# Altium PCB PCB1.PcbDoc
Units mil, origin at the board's own origin, x right, y up, seen from the top; angles counter-clockwise.
Board outline 3535.42 x 2600.42 mil, 4 copper layers (Top Layer, Int1 (GND), Int2 (PWR), Bottom Layer), stack 53.912 mil thick; 78 components, 29 nets, 196 pads, 437 vias.
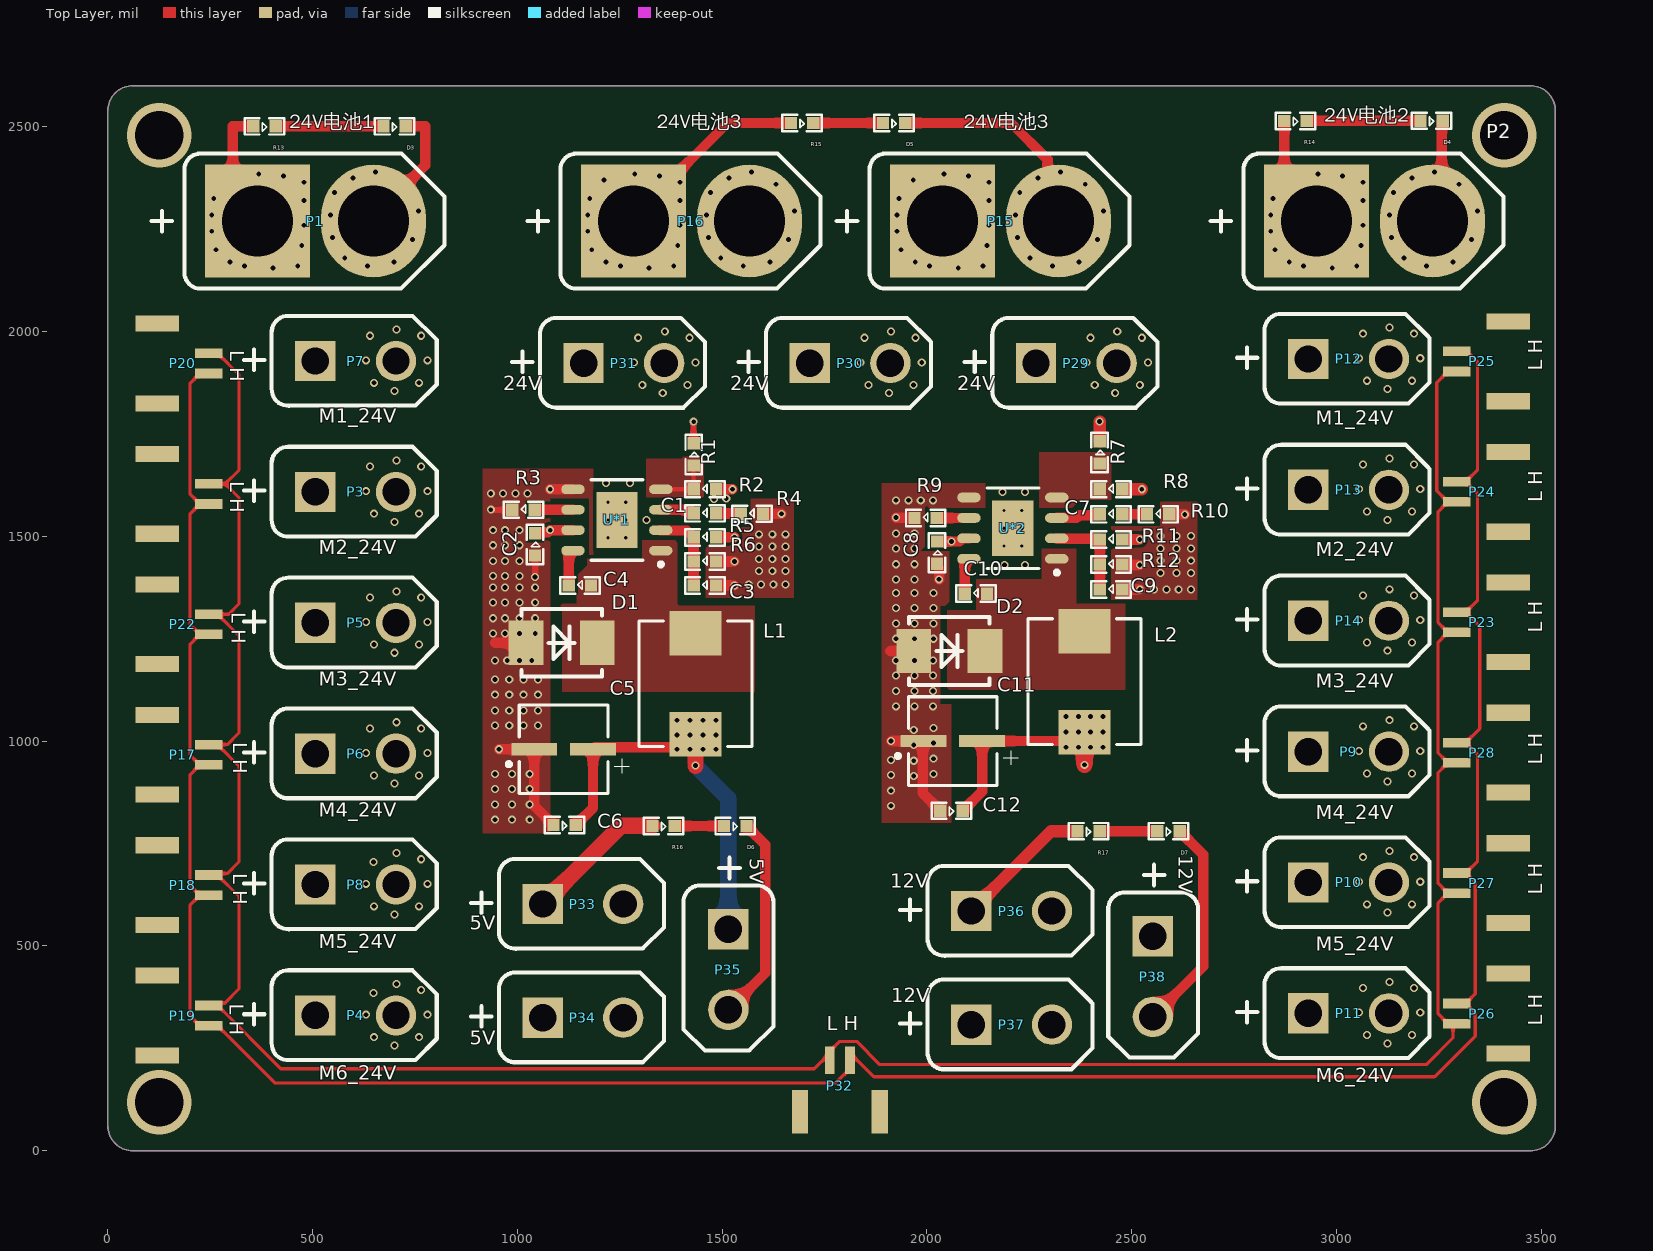
[diagram p0: Top Layer view]
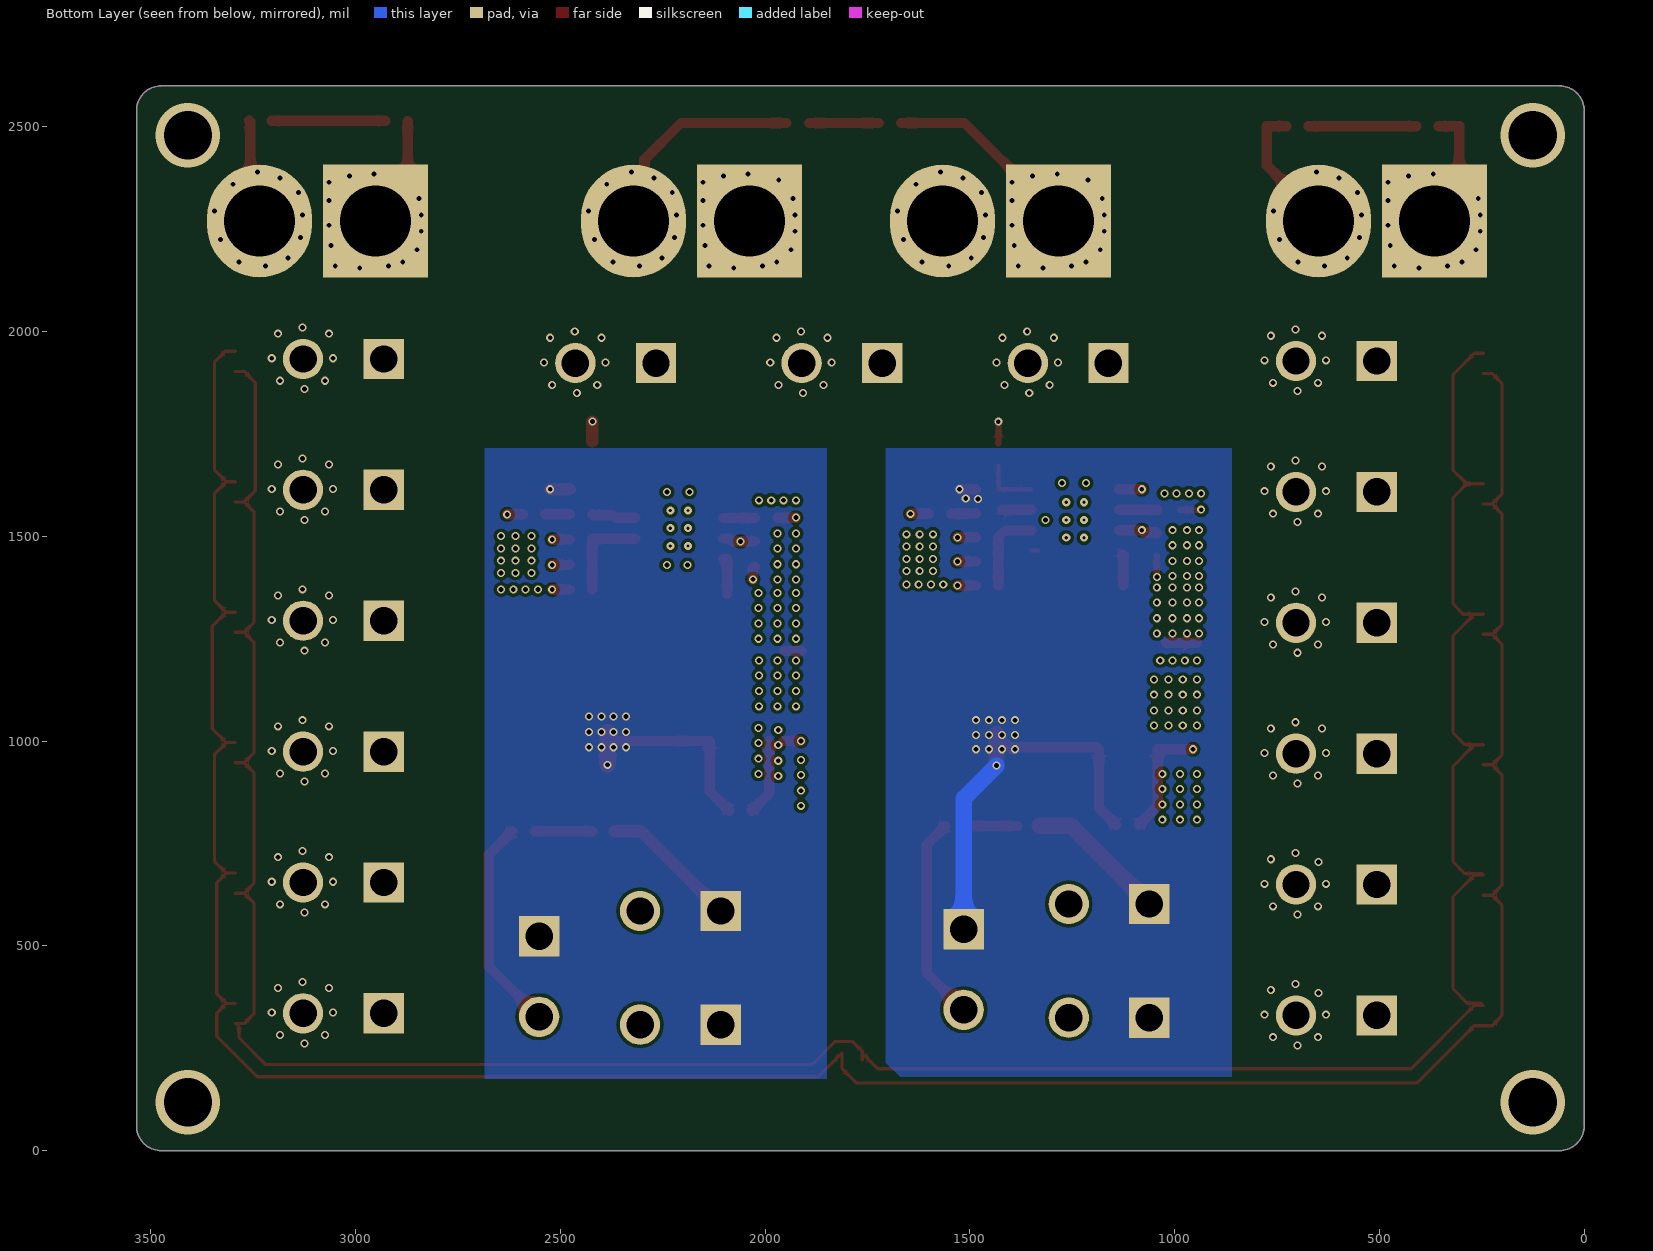
[diagram p1: Bottom Layer view, seen from below]
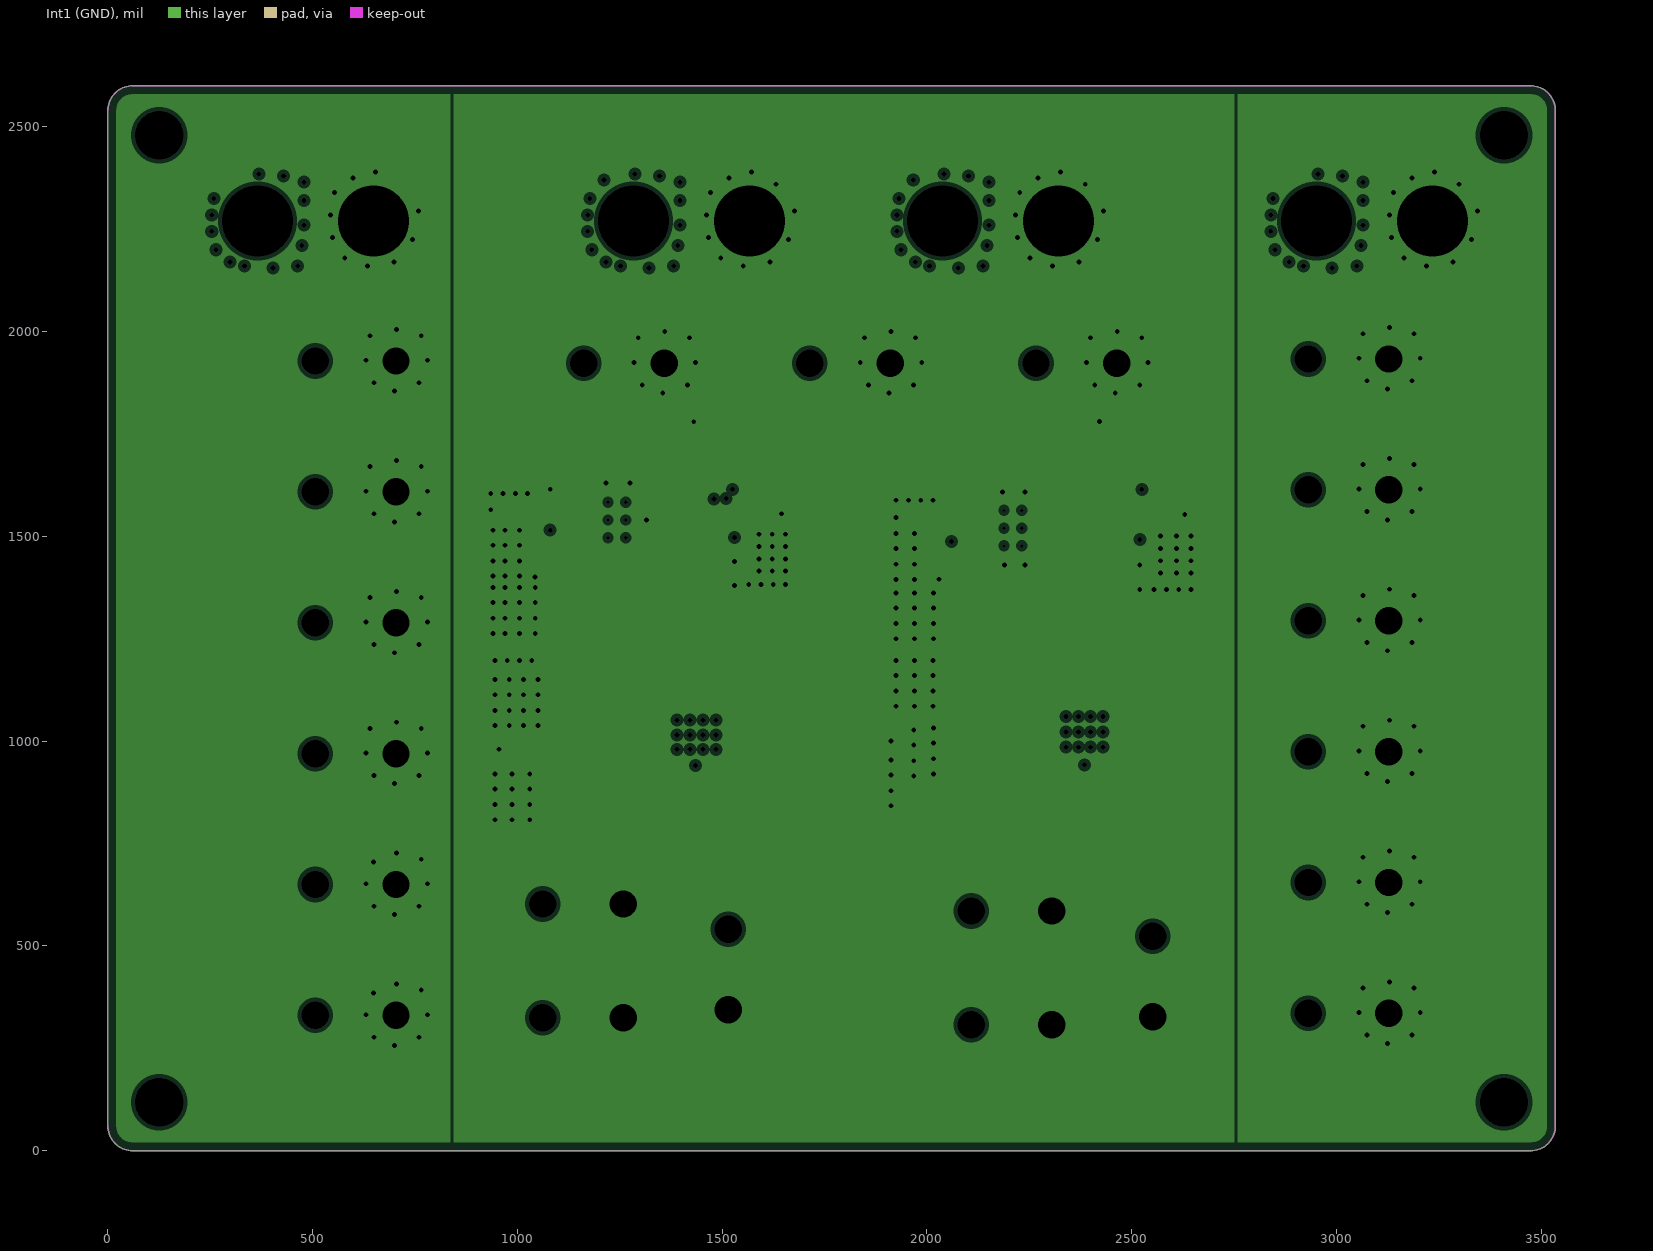
[diagram p2: Int1 (GND), clearances drawn from the general rule]
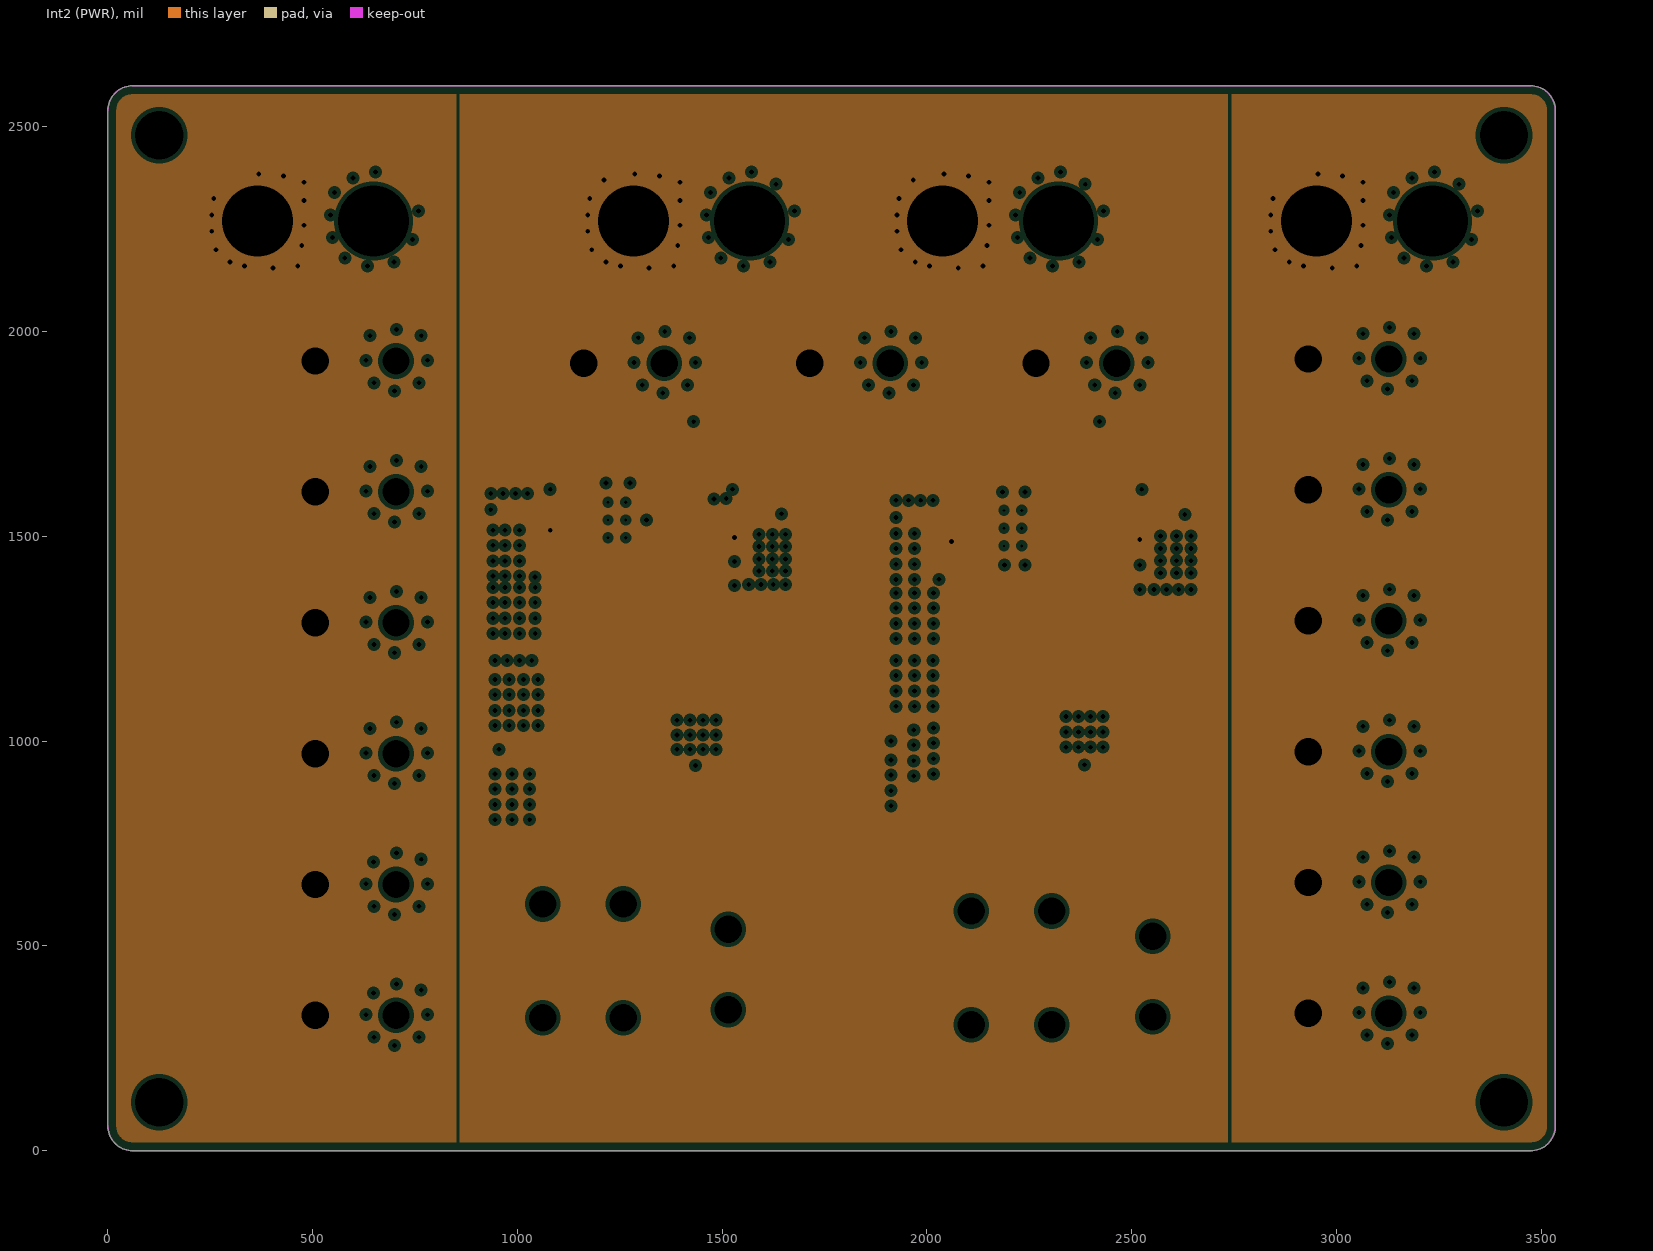
[diagram p3: Int2 (PWR), clearances drawn from the general rule]

## Layer stack, top to bottom
Top Solder: solder mask 1, SM-001, Dk 4
Top Layer: signal copper 1.3779
Dielectric 1: prepreg 5.1, PP-017, Dk 4.3
Dielectric 2: prepreg 5.1, PP-017, Dk 4.3
Int1 (GND): plane copper 1.3779, net (Multiple Nets)
Dielectric 3: core 28, Core-039, Dk 4.8
Int2 (PWR): plane copper 1.3779, net (Multiple Nets)
Dielectric 4: prepreg 5.1, PP-017, Dk 4.3
Dielectric 5: prepreg 5.1, PP-017, Dk 4.3
Bottom Layer: signal copper 1.3779
Bottom Solder: solder mask 1, SM-001, Dk 4

## Board outline
-0.21,60 ccw(c60,60) 60,-0.21 60,0 3475,-0.21 ccw(c3475,60) 3535.21,60 3535,60 3535,2540 3535.21,2540 ccw(c3475,2540) 3475,2600.21 3475,2600 60,2600 60,2600.21 ccw(c60,2540) -0.21,2540 0,2540

## Design rules (kind name [scope] priority, off if disabled: settings)
Clearance Clearance_1 [All] p1: gap=8 ignorepadtopadclearanceinfootprint=FALSE except(0: Arc-Hole Track-Hole SMDPad-Hole THPad-Hole Via-Hole Fill-Hole Poly-Hole Region-Hole Text-Hole)
Clearance Clearance_InPoly [InPolygon] p2: gap=10 ignorepadtopadclearanceinfootprint=FALSE except(0: Arc-Hole Track-Hole SMDPad-Hole THPad-Hole Via-Hole Fill-Hole Poly-Hole Region-Hole Text-Hole)
ComponentClearance [All] p1: gap=10 collisioncheckmode=3 verticalgap=0 showdistances=FALSE
PlaneClearance [All] p1: clearance=10
PlaneConnect [All] p1: planeconnectstyle=Direct reliefexpansion=20 reliefentries=4 reliefconductorwidth=10 reliefairgap=10
PolygonConnect [All] p1: connectstyle=Direct reliefconductorwidth=10 reliefentries=4 polygonreliefangle="90 Angle" airgapwidth=10
RoutingVias [All] p1: holewidth=15 width=25 viastyle="Through Hole" minholewidth=10 minwidth=20 maxholewidth=15 maxwidth=25
SilkToSilkClearance [All] p1: silktosilkclearance=0
SilkToSolderMaskClearance [IsPad] p1: minsilkscreentomaskgap=0 clearancetoexposedcopper=TRUE
SolderMaskExpansion [All] p1: expansion=4
Width Width_PWR [InNetClass('PWR')] p1: maxlimit=100 minlimit=12 preferedwidth=12
Width Width_1 [All] p2: maxlimit=100 minlimit=8 preferedwidth=10
25 further rules are at their usual default settings.

## Components (designator, comment, footprint, x,y, rotation, side; value= is the part's Value field where it differs from the comment)
C1 "Cap" 0603 1457.94,1556.25 r180 top value=150PF
C2 "Cap" 0603 1042.94,1480 r90 top value=100nF
C3 "Cap" 0603 1457.94,1380 r180 top value=100nF
C4 "Cap" 0603 1152.94,1380 r180 top value=100nF
C5 "Cap Pol3" CAP_RVT1E220M0505 1112.94,980 r180 top value=22uF
C6 "Cap" 0603 1115,795 r0 top value=100nF
C7 "Cap" 0603 2450,1553.75 r180 top value=150PF
C8 "Cap" 0603 2025,1460 r90 top value=100nF
C9 "Cap" 0603 2450,1370 r180 top value=100nF
C10 "Cap" 0603 2120,1360 r180 top value=100nF
C11 "Cap Pol3" CAP_RVT1E220M0505 2063.15,1000 r180 top value=22uF
C12 "Cap" 0603 2060,830 r0 top value=100nF
D1 "D Schottky" LC-SMB(DO-214AA)_S2 1107.94,1240 r180 top
D2 "D Schottky" LC-SMB(DO-214AA)_S2 2055,1220 r180 top
D3 "LED0" 0603 700,2501.5 r0 top
D4 "LED0" 0603 3232.5,2515.13 r0 top
D5 "LED0" 0603 1920,2509.51 r0 top
D6 "LED0" 0603 1531.73,792.73 r0 top
D7 "LED0" 0603 2590,780 r0 top
L1 "Inductor" JSHC0650H220M 1435,1140 r270 top value=22uH
L2 "Inductor" JSHC0650H220M 2385,1145 r270 top value=22uH
"L H" "Header 2" GH1.25_2P 8,1701.23 r270 top (schematic designator P21)
P1 "Header 2" TX60-LI-S 506.73,2270 r0 top
P2 "Header 2" TX60-LI-S 3093.27,2270 r0 top
P3 "Header 2" XT30_LI 605,1608.57 r0 top
P4 "Header 2" XT30_LI 605,330 r0 top
P5 "Header 2" XT30_LI 605,1288.93 r0 top
P6 "Header 2" XT30_LI 605,969.28 r0 top
P7 "Header 2" XT30_LI 605,1928.21 r0 top
P8 "Header 2" XT30_LI 605,649.64 r0 top
P9 "Header 2" XT30_LI 3030,974.28 r0 top
P10 "Header 2" XT30_LI 3030,654.64 r0 top
P11 "Header 2" XT30_LI 3030,335 r0 top
P12 "Header 2" XT30_LI 3030,1933.21 r0 top
P13 "Header 2" XT30_LI 3030,1613.57 r0 top
P14 "Header 2" XT30_LI 3030,1293.93 r0 top
P15 "Header 2" TX60-LI-S 2180,2270 r0 top
P16 "Header 2" TX60-LI-S 1425,2270 r0 top
P17 "Header 2" GH1.25_2P 8,1064.14 r270 top
P18 "Header 2" GH1.25_2P 8,745.59 r270 top
P19 "Header 2" GH1.25_2P 8,427.05 r270 top
P20 "Header 2" GH1.25_2P 8,2019.78 r270 top
P22 "Header 2" GH1.25_2P 8,1382.68 r270 top
P23 "Header 2" GH1.25_2P 3532,1192.8 r90 top
P24 "Header 2" GH1.25_2P 3532,1511.35 r90 top
P25 "Header 2" GH1.25_2P 3532,1829.89 r90 top
P26 "Header 2" GH1.25_2P 3532,237.17 r90 top
P27 "Header 2" GH1.25_2P 3532,555.71 r90 top
P28 "Header 2" GH1.25_2P 3532,874.26 r90 top
P29 "Header 2" XT30_LI 2365,1923.21 r0 top
P30 "Header 2" XT30_LI 1812.5,1923.21 r0 top
P31 "Header 2" XT30_LI 1260,1923.21 r0 top
P32 "Header 2" GH1.25_2P 1690.12,-17 r0 top
P33 "Header 2" XT30_LI 1160,602.05 r0 top
P34 "Header 2" XT30_LI 1160,324.55 r0 top
P35 "Header 2" XT30_LI 1515,442.05 r270 top
P36 "Header 2" XT30_LI 2207.01,585 r0 top
P37 "Header 2" XT30_LI 2207.01,307.5 r0 top
P38 "Header 2" XT30_LI 2552.01,425 r270 top
R1 "Res2" 0603 1430.44,1700 r90 top value=40.2K
R2 "Res2" 0603 1457.94,1615 r180 top value=210K
R3 "Res2" 0603 1015,1565 r180 top value=200K
R4 "Res2" 0603 1572.94,1555.06 r180 top value=100K
R5 "Res2" 0603 1457.94,1497.5 r180 top value=500K
R6 "Res2" 0603 1457.94,1438.75 r180 top value=100K
R7 "Res2" 0603 2421.94,1705 r90 top value=40.2K
R8 "Res2" 0603 2450,1615 r180 top value=562K
R9 "Res2" 0603 1997.06,1545 r180 top value=200K
R10 "Res2" 0603 2565,1553.75 r180 top value=147K
R11 "Res2" 0603 2450,1492.5 r180 top value=500K
R12 "Res2" 0603 2450,1431.25 r180 top value=100K
R13 "Res2" 0603 382,2501.5 r0 top value=1.2k
R14 "Res2" 0603 2900,2514.68 r0 top value=1.2k
R15 "Res2" 0603 1695,2509.58 r0 top value=1.2k
R16 "Res2" 0603 1356.73,792.8 r0 top value=270R
R17 "Res2" 0603 2395,780 r0 top value=600R
U*1 "MP1584" MP1584EN_SOIC8E 1242.94,1540 r180 top
U*2 "MP1584" MP1584EN_SOIC8E 2210,1520 r180 top

## Footprints (in the part's own frame and the unit in brackets; to place one, negate y for a bottom-side part, rotate by r counter-clockwise, add the part's x,y. Pads: shape width x height; smd on the part's side, far side on the other; paste and mask are expansions set on the pad)
0603 [mil]
  rect 30x30 smd: 1(-27,0) 2(27.5,-0.06)
  silkscreen extent -48,-20 48,20
CAP_RVT1E220M0505 [mm] "22uf,25V Capacitor"
  rect 2.85x0.75 smd: 1(-1.825,0) 2(1.825,0)
  silkscreen extent -4.06,-2.75 3.52,2.75, body extent -2.75,-2.75 2.75,2.75, height 5.6
GH1.25_2P [mm]
  rect 1x2.7 smd: 0(0,2.845) 0(4.95,2.845)
  rect 0.6x1.7 smd: 1(1.85,6.045) 2(3.1,6.045)
JSHC0650H220M [mm] "Molded Inductor, 2-Leads, Body 7.80x7.00mm, IPC Medium Density"
  rect 2.75x3.2 smd: 1(-3.125,0) 2(3.125,0)
  silkscreen extent -3.9,-3.5 3.9,3.5, body extent -3.9,-3.5 3.9,3.5, height 5
LC-SMB(DO-214AA)_S2 [mil]
  rect 85x107.99 smd: 1(87.01,0) 2(-87.01,0)
  silkscreen extent -98,-83 98,83
MP1584EN_SOIC8E [mm] "SOIC, 8-Leads, Body 4.90x3.90mm, Pitch 1.27mm, Thermal Pad 3.45x2.56mm, IPC Medium Density"
  oval 1.45x0.6 smd: 1(-2.725,1.905) 2(-2.725,0.635) 3(-2.725,-0.635) 4(-2.725,-1.905) 5(2.725,-1.905) 6(2.725,-0.635) 7(2.725,0.635) 8(2.725,1.905)
  rect 2.56x3.45 smd: 9(0,0)
  silkscreen extent -2.85,-2.5 1.6,2.88, body extent -2,-2.5 2,2.5, height 1.7
TX60-LI-S [mm] "长：16mm，宽：8.2mm，高：16mm"
  rect 6.5x7 hole 4.4: 1(-3.6,0)
  oval 6.5x7 hole 4.4: 2(3.6,0)
  silkscreen extent -10.16,-4.19 8,4.19, body extent -8,-4.1 8,4.1, height 16.05
XT30_LI [mm]
  rect 2.5x2.5 hole 1.7: 1(-2.5,0)
  round 2.5 hole 1.7: 2(2.5,0)
  silkscreen extent -6.93,-2.77 5.03,2.8

## Part data
C1 C2 C3 C4 C6 C7 C8 C9 C10 C12: "Capacitor", LatestRevisionDate=17-Jul-2002, LatestRevisionNote="Re-released for DXP Platform.", PackageDescription="Radial Cap, Thru-Hole; 2 Leads; 0.3 in Pin Spacing", PackageReference=RAD-0.3, Published=8-Jun-2000, Publisher="Altium Limited"
C5 C11: "Polarized Capacitor (Surface Mount)", LatestRevisionDate=29-May-2009, LatestRevisionNote="IPC-7351 Footprint Added.", PackageDescription="Chip Capacitor", PackageReference=C0805, Published=8-Jun-2000, Publisher="Altium Limited"
D1 D2: "Schottky Diode", Code_JEDEC=DO-214-AA, LatestRevisionDate=17-Jul-2002, LatestRevisionNote="Re-released for DXP Platform.", PackageDescription="DO-214-AA/SMB; 2 C-Bend Leads; Body 5.3 x 3.6 mm, inc. leads (LxW)", PackageReference=SMB, Published=8-Jun-2000, Publisher="Altium Limited"
D3 D4 D5 D6 D7: "Typical INFRARED GaAs LED", LatestRevisionDate=08-Jul-2005, LatestRevisionNote="Mech Layer 1 removed.", PackageDescription="LED; 2 Leads", PackageReference=LED-0, Published=8-Jun-2000, Publisher="Altium Limited"
"L H" P1 P2 P3 P4 P5 P6 P7 P8 P9 P10 P11 P12 P13 P14 P15 P16 P17 P18 P19 P20 P22 P23 P24 P25 P26 P27 P28 P29 P30 P31 P32 P33 P34 P35 P36 P37 P38: "Header, 2-Pin", LatestRevisionDate=17-Jul-2002, LatestRevisionNote="Re-released for DXP Platform.", Publisher="Altium Limited"
R1 R2 R3 R4 R5 R6 R7 R8 R9 R10 R11 R12 R13 R14 R15 R16 R17: "Resistor", LatestRevisionDate=17-Jul-2002, LatestRevisionNote="Re-released for DXP Platform.", PackageDescription="Axial Device, Thru-Hole; 2 Leads; 0.4 in Pin Spacing", PackageReference=AXIAL-0.4, Published=8-Jun-2000, Publisher="Altium Limited"
L1 L2: Code_IEC=1005, Code_JEITA=0402, LatestRevisionDate=29-May-2009, LatestRevisionNote="IPC-7351 Footprint Added.", PackageDescription="Chip Inductor", PackageReference=0402-A, Published=8-Jun-2000, Publisher="Altium Limited"

## Via types
v1: diameter 19.68, hole 11.81, Top Layer to Bottom Layer, tented both sides, 421 vias
v2: diameter 19.68, hole 7.87, Top Layer to Bottom Layer, 12 vias
v3: diameter 157.48, hole 118.11, Top Layer to Bottom Layer, tented both sides, 4 vias

## Nets (pads, with @x,y where several pads share a name; then routed paths per layer and width w, separated by ;. In a path a pad name is that pad's centre, name@x,y a point inside that pad or via, vN(x,y) a via of type N, cw(c..) or ccw(c..) an arc to the next point about the centre after c; other vN are vias at no path point)
CANH: "L H.2" P17.2 P18.2 P19.2 P20.2 P22.2 P23.2 P24.2 P25.2 P26.2 P27.2 P28.2 P32.2 | length 7026.3
  Top Layer w8: P18.2 P18.2@224.33,623.55 ; P17.2 P17.2@224.33,942.09 ; P22.2 P22.2@224.33,1260.64 ; 245.98,1579.18 224.33,1579.18 ; P20.2 224.33,1897.73 200.52,1873.92 200.52,1602.99 224.33,1579.18 ; P26.2 P26.2@3315.67,359.21 ; P27.2 P27.2@3315.67,677.76 ; P28.2 P28.2@3315.67,996.3 ; P23.2 P23.2@3315.67,1314.85 ; P24.2 P24.2@3315.67,1633.4 ; P25.2 3318.06,1951.94 3345,1925 3345,1662.73 P24.2@3315.67,1633.4 ; P18.2@224.33,623.55 200.52,647.36 200.52,918.28 P17.2@224.33,942.09 ; P18.2@224.33,623.55 200.52,599.73 200.52,328.81 224.33,305 P19.2 267.64,305 407.64,165 1777.83,165 1812.17,199.33 P32.2 1812.17,238.48 1870.64,180 3240,180 3339.48,279.48 3339.48,335.4 P26.2@3315.67,359.21 ; P17.2@224.33,942.09 200.52,965.9 200.52,1236.83 P22.2@224.33,1260.64 ; P22.2@224.33,1260.64 200.52,1284.45 200.52,1555.37 224.33,1579.18 ; P26.2@3315.67,359.21 3339.48,383.02 3339.48,653.95 P27.2@3315.67,677.76 ; P27.2@3315.67,677.76 3345,707.09 3345,966.97 P28.2@3315.67,996.3 ; P28.2@3315.67,996.3 3350,1030.63 3350,1280.52 P23.2@3315.67,1314.85 ; P23.2@3315.67,1314.85 3345,1344.18 3345,1604.07 P24.2@3315.67,1633.4
CANL: "L H.1" P17.1 P18.1 P19.1 P20.1 P22.1 P23.1 P24.1 P25.1 P26.1 P27.1 P28.1 P32.1 | length 7097.6
  Top Layer w8: P22.1 P22.1@267.64,1309.85 ; 245.98,1628.4 286.45,1628.4 ; P20.1 267.64,1946.94 320,1894.58 320,1661.94 286.45,1628.4 ; P32.1 P32.1@1762.95,237.95 ; P26.1 P26.1@3292.81,310 ; P27.1 P27.1@3272.36,628.55 ; P28.1 P28.1@3272.36,947.09 ; P23.1 P23.1@3272.36,1265.64 ; P24.1 P24.1@3272.36,1584.18 ; P25.1 3272.36,1902.73 3245,1875.37 3245,1611.55 P24.1@3272.36,1584.18 ; P22.1@267.64,1309.85 320,1257.49 320,1020 291.45,991.45 246.13,991.45 P17.1 267.64,991.3 320,938.94 320,705 291.45,676.45 249.67,676.45 P18.1 267.64,672.76 320,620.4 320,395 285,360 251.77,360 P19.1 267.64,354.21 421.85,200 1725,200 P32.1@1762.95,237.95 ; P22.1@267.64,1309.85 294.85,1309.85 320,1335 320,1594.85 286.45,1628.4 ; P32.1@1762.95,237.95 1762.95,242.64 1786.76,266.45 1828.95,266.45 1856.97,238.42 1856.97,238.03 1885,210 3220,210 3285,275 3285,302.19 P26.1@3292.81,310 ; P27.1@3272.36,628.55 3248.55,652.36 3248.55,923.28 P28.1@3272.36,947.09 ; P27.1@3272.36,628.55 3248.55,604.73 3248.55,333.81 3272.36,310 P26.1@3292.81,310 ; P28.1@3272.36,947.09 3248.55,970.9 3248.55,1241.83 P23.1@3272.36,1265.64 ; P23.1@3272.36,1265.64 3248.55,1289.45 3248.55,1560.37 P24.1@3272.36,1584.18
GNDC: C2.1 C3.1 C5.2 C6.1 C8.1 C9.1 C11.2 C12.1 D1.1 D2.1 D5.2 D6.2 D7.2 P15.2 P16.2 P29.2 P30.2 P31.2 P33.2 P34.2 P35.2 P36.2 P37.2 P38.2 R1.2 R3.2 R4.1 R6.1 R7.2 R9.2 R10.1 R12.1 U*1.5 U*2.5 | length 2819.9
  Top Layer w15: v1@935,1564.56 R3.2@987,1564.56 ; v1@1043.44,1400.5 C2.1@1043.44,1452.5 ; v1@1430,1780 1430,1728 R1.2
  Top Layer w25: 945,1240 D1.1 ; v1(955,980) C5.2 1041.09,841.91 C6.1 ; v1(1080,1615.06) 1135.59,1615.06 U*1.5 ; C3.1@1485,1380.06 v1(1530,1380.06) ; R6.1@1485,1438.81 v1(1530,1438.81) ; P35.2 1605,433.62 1605,746.9 D6.2 ; R4.1@1600,1555.13 v1(1645,1555.13) ; 1910,1220 D2.1@1953.94,1220 ; v1(1912.22,1000) C11.2@1956.16,1000 ; v1(1925,1545.69) 1968.94,1545.69 R9.2 ; D5.2 2205.55,2509.45 2295,2420 2295,2296.73 P15.2 ; C11.2 1990,998.7 1990,873 C12.1 ; C8.1@2025.06,1426.62 2030,1421.69 v1(2030,1395.13) ; C9.1 v1(2520,1370) ; R12.1 2478.25,1430 v1(2520,1430) ; P38.2 2675,449.57 2675,722.44 D7.2 ; R10.1 v1(2630,1553.75)
  Top Layer w30: R7.2 v1(2422,1780.44)
  other v1: 945,808.06 987,808.06 1030,808.06 1912.22,841.91 945,845 987,845 1030,845 1912.22,878.85 945,883.25 987,883.25 1030,883.25 1967.99,915 1912.22,917.1 945,920 987,920 1030,920 2016,920 1967.99,951.94 1912.22,953.85 2016,956.94 1967.99,990.19 2016,995.19 1967.99,1026.94 2016,1031.94 945,1038.06 980,1038.06 1015,1038.06 1050,1038.06 945,1075 980,1075 1015,1075 1050,1075 1925,1085 1969.56,1085 2015,1085 945,1113.25 980,1113.25 1015,1113.25 1050,1113.25 1925,1121.94 1969.56,1121.94 2015,1121.94 945,1150 980,1150 1015,1150 1050,1150 1925,1160.19 1969.56,1160.19 2015,1160.19 945,1196.94 975,1196.94 1005,1196.94 1035,1196.94 1925,1196.94 1969.56,1196.94 2015,1196.94 1925,1250 1970,1250 2016,1250 940,1263.06 970,1263.06 1005,1263.06 1043.48,1263.06 1925,1286.94 1970,1286.94 2016,1286.94 940,1300 970,1300 1005,1300 1043.48,1300 1925,1325.19 1970,1325.19 2016,1325.19 940,1338.25 970,1338.25 1005,1338.25 1043.48,1338.25 1925,1361.94 1970,1361.94 2016,1361.94 2555,1370.06 2585,1370.06 2615,1370.06 2645,1370.06 940,1375 970,1375 1005,1375 1043.48,1375 1565,1382.68 1595,1382.68 1625,1382.68 1655,1382.68 1925,1395 1970,1395 1042.94,1400.5 940,1403.06 970,1403.06 1005,1403.06 2570.44,1410.56 2610,1410.56 2645,1410.56 1590,1415 1622.5,1415 1655,1415 2190,1430 2240,1430 1925,1431.94 1970,1431.94 940,1440 970,1440 1005,1440 2570.44,1440.56 2610,1440.56 2645,1440.56 1590,1445 1622.5,1445 1655,1445 1925,1470.19 1970,1470.19 2570.44,1470.56 2610,1470.56 2645,1470.56 1590,1475 1622.5,1475 1655,1475 940,1478.25 970,1478.25 1005,1478.25 2570.44,1500.56 2610,1500.56 2645,1500.56 1590,1505 1622.5,1505 1655,1505 1925,1506.94 1970,1506.94 940,1515 970,1515 1005,1515 1315,1540 935,1565.06 1925,1588 1955,1588 1985,1588 2015,1588 935,1605 965,1605 995,1605 1025,1605 2185,1608.57 2240,1608.57 1216.73,1630 1275,1630 1430.5,1780 1355,1850 1907.5,1850 2460,1850 1305,1870 1415,1870 1857.5,1870 1967.5,1870 2410,1870 2520,1870 1285,1925 1435,1925 1837.5,1925 1987.5,1925 2390,1925 2540,1925 1295,1985 1420,1985 1847.5,1985 1972.5,1985 2400,1985 2525,1985 1360,2000 1912.5,2000 2465,2000 1551.73,2160 2306.73,2160 1616.73,2170 2371.73,2170 1496.73,2180 2251.73,2180 1661.73,2225 2416.73,2225 1466.73,2230 2221.73,2230 1461.73,2285 2216.73,2285 1676.73,2295 2431.73,2295 1471.73,2340 2226.73,2340 1631.73,2360 2386.73,2360 1516.73,2375 2271.73,2375 1571.73,2390 2326.73,2390
GNDQ1: D3.2 P1.2 P3.2 P4.2 P5.2 P6.2 P7.2 P8.2 | length 331.3
  Top Layer w25: P1.2 648.46,2279.84 775,2406.38 775,2501.44 D3.2
  other v1: 700,256.79 650,276.79 760,276.79 630,331.79 780,331.79 648.46,385 765,391.79 705,406.79 700,576.43 650,596.43 760,596.43 630,651.43 780,651.43 648.46,704.64 765,711.43 705,726.43 700,896.07 650,916.07 760,916.07 630,971.07 780,971.07 640,1031.07 765,1031.07 705,1046.07 700,1215.72 650,1235.72 760,1235.72 630,1290.72 780,1290.72 640,1350.72 765,1350.72 705,1365.72 700,1535.36 650,1555.36 760,1555.36 630,1610.36 780,1610.36 640,1670.36 765,1670.36 705,1685.36 700,1855 650,1875 760,1875 630,1930 780,1930 640,1990 765,1990 705,2005 633.46,2160 698.46,2170 578.46,2180 743.46,2225 548.46,2230 543.46,2285 758.46,2295 553.46,2340 598.46,2375 653.46,2390
GNDQ2: D4.2 P2.2 P9.2 P10.2 P11.2 P12.2 P13.2 P14.2 | length 255.4
  Top Layer w25: P2.2 3257.5,2292.5 3257.5,2512.56 D4.2
  other v1: 3125,261.79 3075,281.79 3185,281.79 3055,336.79 3205,336.79 3065,396.79 3190,396.79 3130,411.79 3125,581.43 3075,601.43 3185,601.43 3055,656.43 3205,656.43 3065,716.43 3190,716.43 3130,731.43 3125,901.07 3075,921.07 3185,921.07 3055,976.07 3205,976.07 3065,1036.07 3190,1036.07 3130,1051.07 3125,1220.71 3075,1240.71 3185,1240.71 3055,1295.71 3205,1295.71 3065,1355.71 3190,1355.71 3130,1370.71 3125,1540.36 3075,1560.36 3185,1560.36 3055,1615.36 3205,1615.36 3065,1675.36 3190,1675.36 3130,1690.36 3125,1860 3075,1880 3185,1880 3055,1935 3205,1935 3065,1995 3190,1995 3130,2010 3220,2160 3285,2170 3165,2180 3330,2225 3135,2230 3130,2285 3345,2295 3140,2340 3300,2360 3185,2375 3240,2390
NetC1_1: C1.1 R4.2 | length 61
  Top Layer w25: C1.1 1485.5,1555.69 1544.88,1555.69 R4.2
NetC1_2: C1.2 U*1.3 | length 83.8
  Top Layer w10: C1.2@1421.75,1565 C1.2
  Top Layer w25: U*1.3 C1.2@1421.75,1565
NetC3_2: C3.2 R5.2 R6.2 U*1.2 | length 204.9
  Top Layer w25: U*1.2 1350.91,1514.31 1413.69,1514.31 R5.2 R6.2 C3.2
NetC4_1: C4.1 D1.2 L1.1 U*1.1 | length 16.7
  Top Layer w10: U*1.1@1333.49,1465 U*1.1
NetC4_2: C4.2 U*1.8 | length 89.2
  Top Layer w10: U*1.8@1125.44,1454.78 U*1.8
  Top Layer w25: C4.2 U*1.8@1125.44,1454.78
NetC7_1: C7.1 R10.2 | length 60.5
  Top Layer w25: C7.1 R10.2
NetC7_2: C7.2 U*2.3 | length 108.9
  Top Layer w25: U*2.3 2317.97,1545.69 2365.69,1545.69 2371.31,1551.31 2420,1551.31 C7.2
NetC9_2: C9.2 R11.2 R12.2 U*2.2 | length 228.7
  Top Layer w25: U*2.2 2317.97,1494.31 2420.75,1494.31 R11.2 R12.2 C9.2
NetC10_1: C10.1 D2.2 L2.1 U*2.1
NetC10_2: C10.2 U*2.8 | length 94.7
  Top Layer w25: C10.2 2092.5,1444.31 2093.19,1445 U*2.8
NetD3_1: D3.1 R13.2 | length 263.5
  Top Layer w25: R13.2@409.53,2501.47 D3.1
NetD4_1: D4.1 R14.2 | length 278.2
  Top Layer w25: R14.2 2927.76,2514.87 3205.24,2514.87 D4.1
NetD5_1: D5.1 R15.2 | length 170.5
  Top Layer w25: R15.2 D5.1
NetD6_1: D6.1 R16.2 | length 120.5
  Top Layer w25: R16.2 D6.1
NetD7_1: D7.1 R17.2 | length 140.5
  Top Layer w25: R17.2@2422.53,779.97 D7.1
NetR1_1: R1.1 R2.2 U*1.4 | length 138.2
  Top Layer w10: U*1.4 1430.37,1615 R2.2 R1.1
NetR3_1: R3.1 U*1.6 | length 93.7
  Top Layer w25: R3.1 U*1.6
NetR7_1: R7.1 R8.2 U*2.4
NetR9_1: R9.1 U*2.6 | length 78.7
  Top Layer w25: R9.1 U*2.6
VCC5: C5.1 C6.2 L1.2 P33.1 P34.1 P35.1 R2.1 R16.1 | length 1369.1
  Top Layer w25: C6.2 1184.79,837.22 C5.1 1189.79,985 1385,985 1393.03,985 1398.03,980 L1.2 ; R2.1 v1(1525,1615)
  Top Layer w40: P33.1 1252.32,792.8 R16.1 ; v1(1435,940) 1435,980 L1.2
  Bottom Layer w40: v1(1435,940) 1515,860 P35.1
  other v1: 1390,980 1421.67,980 1453.33,980 1485,980 1390,1015 1421.67,1015 1453.33,1015 1485,1015 1390,1051.07 1421.67,1051.07 1453.33,1051.07 1485,1051.07 1480,1591.25 1510,1592.5
VCC12: C11.1 C12.2 L2.2 P36.1 P37.1 P38.1 R8.1 R17.1 | length 916.9
  Top Layer w25: C12.2 2135,877.44 C11.1 2363.03,1000 L2.2
  Top Layer w30: P36.1 2303.58,780 R17.1 ; R8.1 v1(2524.94,1615) v1@2525,1615.06
  Top Layer w40: v1(2385,942.09) L2.2
  other v1: 2340,985 2370,985 2400,985 2430,985 2340,1022.5 2370,1022.5 2400,1022.5 2430,1022.5 2340,1060 2370,1060 2400,1060 2430,1060
VCC24C: C2.2 C8.2 P15.1 P16.1 P29.1 P30.1 P31.1 R5.1 R11.1 R15.1 U*1.7 U*2.7 | length 744.4
  Top Layer w25: C2.2 1045.5,1510 1075,1510 v1(1080,1515) ; 1090,1515 U*1.7 ; P16.1 1283.27,2279.84 1513,2509.58 R15.1 ; R5.1 1485,1497.56 v1(1530,1497.56) ; C8.2 v1(2060,1487.5) 2079.86,1487.5 2087.36,1495 U*2.7 ; R11.1 2477.06,1492.56 v1(2520,1492.56)
  other v1: 1321.73,2155 2076.73,2155 1251.73,2160 1381.73,2160 2006.73,2160 2136.73,2160 1216.73,2170 1971.73,2170 1181.73,2200 1936.73,2200 1391.73,2210 2146.73,2210 1171.73,2245 1926.73,2245 1396.73,2260 2151.73,2260 1171.73,2285 1926.73,2285 1396.73,2320 2151.73,2320 1176.73,2325 1931.73,2325 1396.73,2365 2151.73,2365 1211.73,2370 1966.73,2370 1346.73,2380 2101.73,2380 1286.73,2385 2041.73,2385
VCC24Q1: P1.1 P3.1 P4.1 P5.1 P6.1 P7.1 P8.1 R13.1 | length 306.3
  Top Layer w25: R13.1 354.94,2501.44 305,2501.44 305,2330 P1.1
  other v1: 403.46,2155 333.46,2160 463.46,2160 298.46,2170 263.46,2200 473.46,2210 253.46,2245 478.46,2260 253.46,2285 478.46,2320 258.46,2325 478.46,2365 428.46,2380 368.46,2385
VCC24Q2: P2.1 P9.1 P10.1 P11.1 P12.1 P13.1 P14.1 R14.1 | length 277.2
  Top Layer w25: R14.1 2873,2348.54 P2.1
  other v1: 2990,2155 2920,2160 3050,2160 2885,2170 2850,2200 3060,2210 2840,2245 3065,2260 2840,2285 3065,2320 2845,2325 3065,2365 3015,2380 2955,2385
pads on no net: "L H.0" P17.0 P18.0 P19.0 P20.0 P22.0 P23.0 P24.0 P25.0 P26.0 P27.0 P28.0 P32.0 U*1.9 U*2.9
copper on no net:
  other v2: 2188.35,1476.69 2231.65,1476.69 1221.28,1496.69 1264.59,1496.69 2188.35,1520 2231.65,1520 1221.28,1540 1264.59,1540 2188.35,1563.31 2231.65,1563.31 1221.28,1583.31 1264.59,1583.31
  other v3: 125,117.8 3409.57,117.8 125,2480 3409.57,2480

## Polygon pours and split planes (outlines as drawn)
GNDC on Top Layer "Top Layer-GNDC" (solid, pour order 20): 2450,1345 2450,1525 2570,1525 2570,1583.31 2570.88,1584.18 2660,1584.18 2660,1345 2655,1345
GNDC on Top Layer "Top Layer-GNDC 1" (solid, pour order 18): 2060,800 2060,1090 2030,1090 2033,1093 2033,1330 2045,1330 2055,1340 2055,1464.09 1985.91,1464.09 1985,1465 1995,1475 1995,1570 2000,1575 2005,1570 2142.01,1570 2142.01,1630 1890,1630 1890,800
GNDC on Top Layer "Top Layer-GNDC 2" (solid, pour order 16): 1675,1591.25 1570,1591.25 1570,1527.5 1572.5,1525 1570,1522.5 1460,1522.5 1460,1350 1675,1350
NetR7_1 on Top Layer "Top Layer-NetR7_1" (solid, pour order 12): 2450,1590 2375,1590 2355,1570 2275,1570 2275,1705 2450,1705
NetC10_1 on Top Layer "Top Layer-NetC10_1" (solid, pour order 10): 2365,1470 2280,1470 2280,1395 2120,1395 2120,1320 2050,1320 2050,1130 2055,1125 2485,1125 2485,1335 2365,1335
GNDC on Top Layer "Top Layer-GNDC 3" (solid, pour order 4): 1185,1455 1185,1665 915,1665 915,775 1080.03,775 1080.03,1592.5 1172.5,1592.5 1175,1590 1175,1455
NetR1_1 on Top Layer "Top Layer-NetR1_1" (solid, pour order 2): 1315,1690 1315,1595 1450,1595 1455,1590 1455,1695 1405,1695 1400,1690
NetC4_1 on Top Layer "Top Layer-NetC4_1" (solid, pour order 0): 1390,1485 1385,1490 1305,1490 1305,1438.19 1298.19,1445 1170,1445 1170,1430 1145,1405 1145,1335 1110,1335 1105,1330 1110,1325 1110,1120 1570,1120 1575,1115 1580,1120 1580,1330 1395,1330 1390,1335
VCC12 on Bottom Layer "Bottom Layer-VCC12" (solid, pour order 22): 1850,175 1850,1715 2685,1715 2685,175
NetC4_1 on Bottom Layer "Bottom Layer-NetC4_1" (solid, pour order 8): 1110,1005
VCC5 on Bottom Layer "Bottom Layer-VCC5" (solid, pour order 6): 1680,185 1675,180 860,180 860,1715 1705,1715 1705,215 1670,180
GNDQ1 on Int1 (GND) (split plane): 60,2579.9 835.92,2579.9 835.92,165 835.92,20.05 60,20.1 58.23,19.92 54.75,20.15 49.6,21.18 44.62,22.87 39.9,25.19 35.53,28.11 31.58,31.58 28.11,35.53 25.19,39.9 22.87,44.62 21.18,49.6 20.15,54.75 19.84,59.49 19.89,60 20.1,2540 19.92,2541.78 20.15,2545.25 21.18,2550.4 22.87,2555.38 25.19,2560.1 28.11,2564.47 31.58,2568.42 35.53,2571.89 39.9,2574.81 44.62,2577.13 49.6,2578.82 54.75,2579.85 58.22,2580.08
GNDQ2 on Int1 (GND) (split plane): 3480.25,2579.85 3485.4,2578.82 3490.38,2577.13 3495.1,2574.81 3499.47,2571.89 3503.42,2568.42 3506.89,2564.47 3509.81,2560.1 3512.13,2555.38 3513.82,2550.4 3514.85,2545.25 3515.08,2541.77 3514.9,2540 3514.9,60 3515.08,58.22 3514.85,54.75 3513.82,49.6 3512.13,44.62 3509.81,39.9 3506.89,35.53 3503.42,31.58 3499.47,28.11 3495.1,25.19 3490.38,22.87 3485.4,21.18 3480.25,20.15 3475.51,19.84 3475,19.89 2759.08,19.93 2759.08,2085 2759.08,2579.9 3475,2579.9 3476.77,2580.08
GNDC on Int1 (GND) (split plane): 2750.92,2085 2750.92,19.93 844.08,20.05 844.08,170 844.08,2579.9 2750.92,2579.9
VCC24Q1 on Int2 (PWR) (split plane): 60,2579.9 850.92,2579.9 850.92,2065 850.92,20.05 60,20.1 58.23,19.92 54.75,20.15 49.6,21.18 44.62,22.87 39.9,25.19 35.53,28.11 31.58,31.58 28.11,35.53 25.19,39.9 22.87,44.62 21.18,49.6 20.15,54.75 19.84,59.49 19.89,60 20.1,2540 19.92,2541.78 20.15,2545.25 21.18,2550.4 22.87,2555.38 25.19,2560.1 28.11,2564.47 31.58,2568.42 35.53,2571.89 39.9,2574.81 44.62,2577.13 49.6,2578.82 54.75,2579.85 58.22,2580.08
VCC24Q2 on Int2 (PWR) (split plane): 3480.25,2579.85 3485.4,2578.82 3490.38,2577.13 3495.1,2574.81 3499.47,2571.89 3503.42,2568.42 3506.89,2564.47 3509.81,2560.1 3512.13,2555.38 3513.82,2550.4 3514.85,2545.25 3515.08,2541.77 3514.9,2540 3514.9,60 3515.08,58.22 3514.85,54.75 3513.82,49.6 3512.13,44.62 3509.81,39.9 3506.89,35.53 3503.42,31.58 3499.47,28.11 3495.1,25.19 3490.38,22.87 3485.4,21.18 3480.25,20.15 3475.51,19.84 3475,19.89 2744.08,19.93 2744.08,2579.9 3475,2579.9 3476.77,2580.08
VCC24C on Int2 (PWR) (split plane): 2735.92,19.93 859.08,20.05 859.08,2065 859.08,2579.9 2735.92,2579.9

## Keep-outs
Keep-Out Layer:
  lines w1.97: -0.62,2540 cw(c59.58,2540) 59.58,2600.21 ; 0,2540 -0.21,60 ccw(c60,60) 60,-0.21 ; 59.58,-0.21 cw(c59.58,60) -0.62,60 -0.42,2540 ; 59.58,0 3474.58,-0.21 ccw(c3474.58,60) 3534.79,60 ; 59.58,2600 3474.58,2600 ; 60,0 3475,-0.21 ccw(c3475,60) 3535.21,60 ; 60,2600 3475,2600 ; 60,2600.21 ccw(c60,2540) -0.21,2540 ; 3474.58,2600.21 cw(c3474.58,2540) 3534.79,2540 ; 3475,2600.21 cw(c3475,2540) 3535.21,2540 ; 3534.58,60 3534.58,2540 ; -0.42,60 ccw(c59.79,60) 59.79,-0.21 cw(c59.79,60) -0.42,60 ; -0.42,60 -0.21,2540 ; -0.42,60 -0.21,2540 ; -0.42,2540 cw(c59.79,2540) 59.79,2600.21 ccw(c59.79,2540) -0.42,2540 ; 3474.79,-0.21 ccw(c3474.79,60) 3535,60 ; 3474.79,-0.21 ccw(c3474.79,60) 3535,60 ; 3474.79,-0.21 59.79,0 3474.79,-0.21 ; 3534.79,60 3534.79,2540 ; 3534.79,60 3534.79,2540 ; 3535,60 3535,2540 ; 3535,2540 ccw(c3474.79,2540) 3474.79,2600.21 cw(c3474.79,2540) 3535,2540 ; 59.79,2600 3474.79,2600 59.79,2600

## Other copper
Int1 (GND) (plane layer: these items are gaps in the copper):
  lines w8: 840,165 840,2655 840,2675 -75,2675 -75,-101.23 840,-101.23 840,170 ; 2755,-75 2755,2085 2755,2638.44 2758.44,2635 3680,2635 3680,2075 3680,-75 2755,-75
Int2 (PWR) (plane layer: these items are gaps in the copper):
  lines w8: 3285,-90 3580,-90 3590,-100 3590,2640 3580,2650 2740,2650 2740,-90 3286.56,-90 ; -70,-115 -70,2080 -70,2660 851.56,2660 855,2663.44 855,2065 855,-115 -70,-115

## Silkscreen, mask and mechanical layers (free items; w line width, h text height)
Top Overlay:
  text "24V电池2" at 2970,2500 h60
  text "24V电池1" at 443.27,2485 h60
  text "24V电池3" at 1340,2485 h60
  text "24V电池3" at 2090,2485 h60
  text "L H" at 3515,1905 h60 r90
  text "24V" at 965,1845 h60
  text "24V" at 1520,1845 h60
  text "24V" at 2074.69,1845 h60
  text "M1_24V" at 515,1765.44 h60
  text "M1_24V" at 2950,1760 h60
  text "L H" at 286.45,1635 h60 r270
  text "L H" at 3515,1583.31 h60 r90
  text "M2_24V" at 515,1444.44 h60
  text "M2_24V" at 2950,1439 h60
  text "L H" at 290,1315 h60 r270
  text "L H" at 3515,1265 h60 r90
  text "M3_24V" at 515,1123.44 h60
  text "M3_24V" at 2950,1118 h60
  text "L H" at 293.46,997.22 h60 r270
  text "L H" at 3515,942.09 h60 r90
  text "M4_24V" at 515,802.44 h60
  text "M4_24V" at 2950,797 h60
  text "12V" at 2603.24,721.43 h60 r270
  text "5V" at 1555,713.43 h60 r270
  text "L H" at 293.46,677.58 h60 r270
  text "12V" at 1910,629.98 h60
  text "L H" at 3515,625 h60 r90
  text "5V" at 883,527.55 h60
  text "M5_24V" at 515,481.44 h60
  text "M5_24V" at 2950,476 h60
  text "L H" at 285,357.94 h60 r270
  text "12V" at 1912.5,350 h60
  text "L H" at 3515,305 h60 r90
  text "L H" at 1755,281.79 h60
  text "5V" at 883,245.55 h60
  text "M6_24V" at 515,160.44 h60
  text "M6_24V" at 2950,155 h60
Mechanical 1:
  lines w1.97: -0.62,2540 cw(c59.58,2540) 59.58,2600.21 ; 0,2540 -0.21,60 ccw(c60,60) 60,-0.21 ; 59.58,-0.21 cw(c59.58,60) -0.62,60 -0.42,2540 ; 59.58,0 3474.58,-0.21 ccw(c3474.58,60) 3534.79,60 ; 59.58,2600 3474.58,2600 ; 60,0 3475,-0.21 ccw(c3475,60) 3535.21,60 ; 60,2600 3475,2600 ; 60,2600.21 ccw(c60,2540) -0.21,2540 ; 3474.58,2600.21 cw(c3474.58,2540) 3534.79,2540 ; 3475,2600.21 cw(c3475,2540) 3535.21,2540 ; 3534.58,60 3534.58,2540 ; -0.42,60 ccw(c59.79,60) 59.79,-0.21 cw(c59.79,60) -0.42,60 ; -0.42,60 -0.21,2540 ; -0.42,60 -0.21,2540 ; -0.42,2540 cw(c59.79,2540) 59.79,2600.21 ccw(c59.79,2540) -0.42,2540 ; 3474.79,-0.21 ccw(c3474.79,60) 3535,60 ; 3474.79,-0.21 ccw(c3474.79,60) 3535,60 ; 3474.79,-0.21 59.79,0 3474.79,-0.21 ; 3534.79,60 3534.79,2540 ; 3534.79,60 3534.79,2540 ; 3535,60 3535,2540 ; 3535,2540 ccw(c3474.79,2540) 3474.79,2600.21 cw(c3474.79,2540) 3535,2540 ; 59.79,2600 3474.79,2600 59.79,2600